# EAGLE board rekick010-panelized (EAGLE 4.16), part 1 of 2
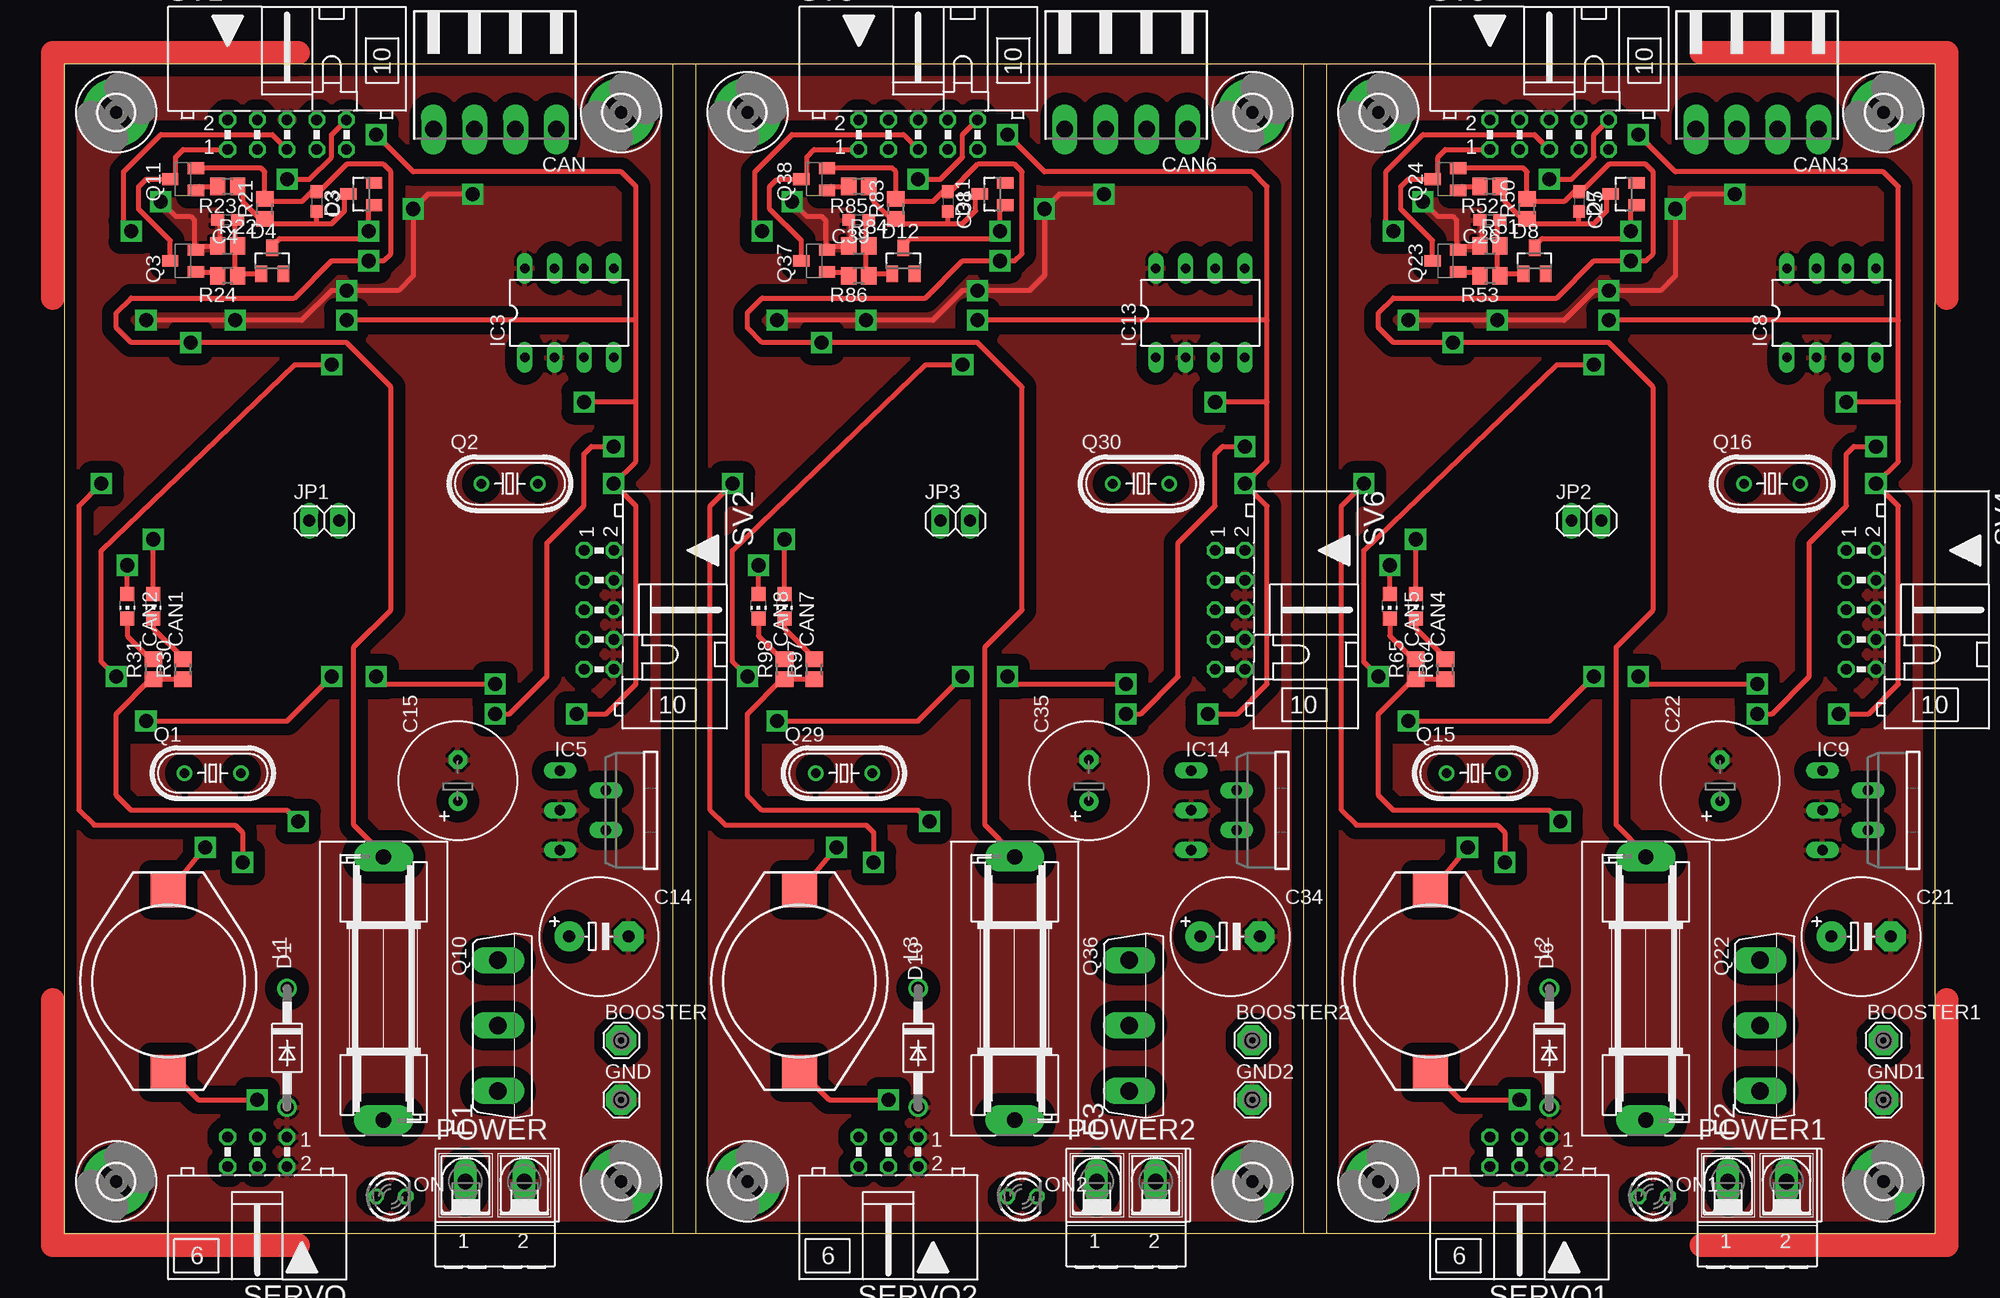
[diagram p0: board, top side]
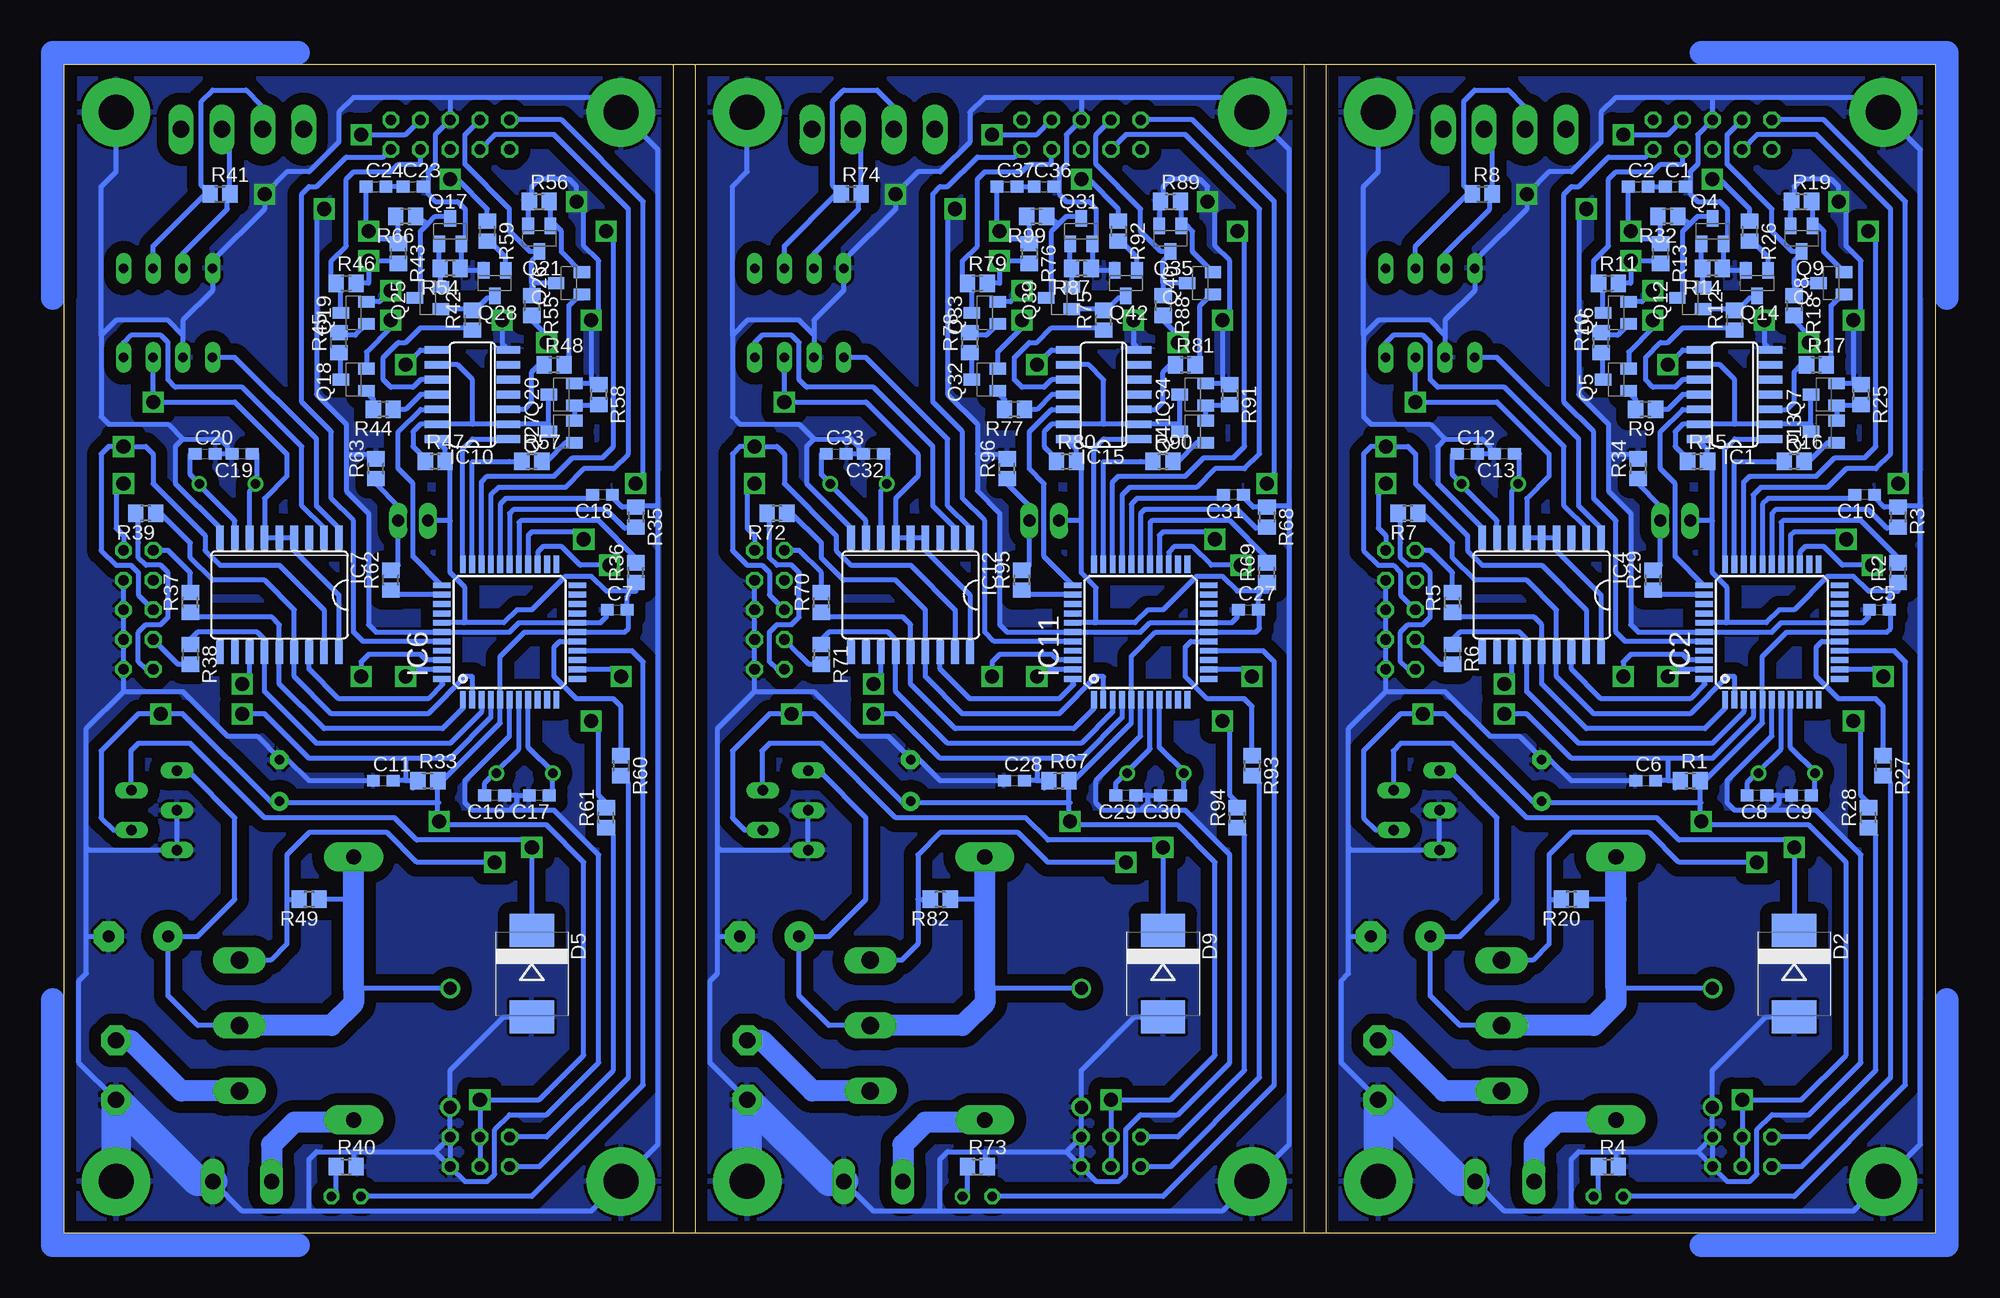
[diagram p1: board, bottom side, seen from below]

Size 160 x 100 mm. Coordinates in mm from the lower left corner, seen from the top.
Outline: 0,0 160,0
Outline: 160,0 160,100
Outline: 160,100 0,100
Outline: 0,100 0,0
Outline: 0,0 52.05,0 52.05,100 0,100
Outline: 0,100 0,0
Outline: 160,0 107.95,0 107.95,100 160,100
Outline: 160,0 160,100
Outline: 53.98,0 106.03,0 106.03,100 53.98,100 53.98,0
Copper layers (1*16): Top 0.035mm / dielectric 1.5mm / Bottom 0.035mm
Design rules "olimex_10mils": minimum track width 10mil, minimum drill 24mil, track to track 10mil, track to pad 10mil, pad to pad 10mil, via to via 10mil, smd to smd 10mil, copper to edge 40mil, drill to drill 10mil, minimum pad ring 10mil, minimum via ring 8mil, stop-mask expansion 0mil, vias tented up to drill 0mil, thermal gap 10mil
Net classes: 1 Power: width 0.406 mm

## Footprints (pad centres in the part's own frame; a part is rotated, then mirrored left to right if it is on the bottom)
SE14 = drill 1.397 pad 2.54 octagon: MP 0,0
C0603 = smd 1.1 x 1: 1 -0.85,0; 2 0.85,0
E5-10,5 = drill 1.016 pad 2.54 round: + -2.54,0 | drill 1.016 pad 2.54 octagon: - 2.54,0
E3,5-10 = drill 0.813 pad 1.6 round: + -1.778,0 | drill 0.813 pad 1.6 octagon: - 1.778,0
90-4 = drill 1.422 long: 1 -5.25,5.25; 2 -1.75,5.25; 3 1.75,5.25; 4 5.25,5.25
CHIP-LED0805 = smd 1.2 x 1.2: A 0,-1.05; C 0,1.05
DO41-10 = drill 1.118 round: A 5.08,0; C -5.08,0
SMC = smd 2.8 x 3.8: A 3.7,0; C -3.7,0
SOT23 = smd 1 x 1.4: 1 -0.95,-1.1; 2 0.95,-1.1; 3 0,1.1
SH22,5A = drill 1.321 pad 2.54 long: 1 -11.252,0; 2 11.252,0
3,0-PAD = drill 3 pad 5.842 round: B3,0 0,0
SO14 = smd 0.66 x 2.032: 1 -3.81,-3.073; 2 -2.54,-3.073; 3 -1.27,-3.073; 4 0,-3.073; 5 1.27,-3.073; 6 2.54,-3.073; 7 3.81,-3.073; 8 3.81,3.073; 9 2.54,3.073; 10 1.27,3.073; 11 0,3.073; 12 -1.27,3.073; 13 -2.54,3.073; 14 -3.81,3.073
TQFP44 = smd 1.5 x 0.5: 1 -5.8,4; 2 -5.8,3.2; 3 -5.8,2.4; 4 -5.8,1.6; 5 -5.8,0.8; 6 -5.8,0; 7 -5.8,-0.8; 8 -5.8,-1.6; 9 -5.8,-2.4; 10 -5.8,-3.2; 11 -5.8,-4; 23 5.8,-4; 24 5.8,-3.2; 25 5.8,-2.4; 26 5.8,-1.6; 27 5.8,-0.8; 28 5.8,0; 29 5.8,0.8; 30 5.8,1.6; 31 5.8,2.4; 32 5.8,3.2; 33 5.8,4 | smd 0.5 x 1.5: 12 -4,-5.8; 13 -3.2,-5.8; 14 -2.4,-5.8; 15 -1.6,-5.8; 16 -0.8,-5.8; 17 0,-5.8; 18 0.8,-5.8; 19 1.6,-5.8; 20 2.4,-5.8; 21 3.2,-5.8; 22 4,-5.8; 34 4,5.8; 35 3.2,5.8; 36 2.4,5.8; 37 1.6,5.8; 38 0.8,5.8; 39 0,5.8; 40 -0.8,5.8; 41 -1.6,5.8; 42 -2.4,5.8; 43 -3.2,5.8; 44 -4,5.8
DIL08 = drill 0.813 long: 1 -3.81,-3.81; 2 -1.27,-3.81; 3 1.27,-3.81; 4 3.81,-3.81; 5 3.81,3.81; 6 1.27,3.81; 7 -1.27,3.81; 8 -3.81,3.81
SO18L = smd 0.66 x 2.032: 1 -5.08,-4.902; 2 -3.81,-4.902; 3 -2.54,-4.902; 4 -1.27,-4.902; 5 0,-4.902; 6 1.27,-4.902; 7 2.54,-4.902; 8 3.81,-4.902; 9 5.08,-4.902; 10 5.08,4.902; 11 3.81,4.902; 12 2.54,4.902; 13 1.27,4.902; 14 0,4.902; 15 -1.27,4.902; 16 -2.54,4.902; 17 -3.81,4.902; 18 -5.08,4.902
TO220-51 = drill 0.9 long: 1 -3.4,-8.4; 2 -1.7,-4.5; 3 0,-8.4; 4 1.7,-4.5; 5 3.4,-8.4
1X02 = drill 1.016 long: 1 -1.27,0; 2 1.27,0
PISR = smd 3 x 3: P$1 -7.8,0; P$2 7.8,0
LED3MM = drill 0.813 octagon: A -1.27,0; K 1.27,0
AK500/2-H = drill 1.321 long: 1 -2.515,0; 2 2.515,0
HC49/S = drill 0.813 round: 1 -2.413,0; 2 2.413,0
HC49U-V = drill 0.813 round: 1 -2.413,0; 2 2.413,0
SOT23-BEC = smd 1 x 1.4: B -0.95,-1.1; C 0,1.1; E 0.95,-1.1
TO247BV = drill 1.499 long: D 0,-2.921; G -5.588,-2.921; S 5.588,-2.921
R0805 = smd 1.3 x 1.5: 1 -0.85,0; 2 0.85,0
ML6L = drill 0.914 octagon: 1 -2.54,-1.27; 2 -2.54,1.27; 3 0,-1.27; 4 0,1.27; 5 2.54,-1.27; 6 2.54,1.27
ML10L = drill 0.914 octagon: 1 -5.08,-1.27; 2 -5.08,1.27; 3 -2.54,-1.27; 4 -2.54,1.27; 5 0,-1.27; 6 0,1.27; 7 2.54,-1.27; 8 2.54,1.27; 9 5.08,-1.27; 10 5.08,1.27

## Placement (x,y rotation side)
BOOSTER  SE14  [SE14]  47.62,16.51 0 top
BOOSTER1  SE14  [SE14]  155.57,16.51 0 top
BOOSTER2  SE14  [SE14]  101.6,16.51 0 top
C1  0  [C0603]  22.23,89.53 0 bottom
C2  0  [C0603]  25.4,89.53 0 bottom
C3  22p  [C0603]  21.59,88.27 270 top
C4  22p  [C0603]  13.97,86.68 180 top
C5  100n  [C0603]  4.76,53.34 0 bottom
C6  100n  [C0603]  24.77,38.73 0 bottom
C7  100n  [C0603]  112.71,53.34 0 bottom
C8  22p  [C0603]  15.24,37.47 180 bottom
C9  22p  [C0603]  11.43,37.47 180 bottom
C10  100n  [C0603]  6.03,63.18 180 bottom
C11  100n  [C0603]  132.72,38.73 0 bottom
C12  22p  [C0603]  40.01,66.67 0 bottom
C13  22p  [C0603]  36.83,66.67 180 bottom
C14  220µF/35V  [E5-10,5]  45.72,25.4 0 top
C15  220µF/25V  [E3,5-10]  33.66,38.73 90 top
C16  22p  [C0603]  123.19,37.47 180 bottom
C17  22p  [C0603]  119.38,37.47 180 bottom
C18  100n  [C0603]  113.98,63.18 180 bottom
C19  22p  [C0603]  144.78,66.67 180 bottom
C20  22p  [C0603]  147.96,66.67 0 bottom
C21  220µF/35V  [E5-10,5]  153.67,25.4 0 top
C22  220µF/25V  [E3,5-10]  141.6,38.73 90 top
C23  0  [C0603]  130.18,89.53 0 bottom
C24  0  [C0603]  133.35,89.53 0 bottom
C25  22p  [C0603]  129.54,88.27 270 top
C26  22p  [C0603]  121.92,86.68 180 top
C27  100n  [C0603]  58.74,53.34 0 bottom
C28  100n  [C0603]  78.74,38.73 0 bottom
C29  22p  [C0603]  69.22,37.47 180 bottom
C30  22p  [C0603]  65.41,37.47 180 bottom
C31  100n  [C0603]  60.01,63.18 180 bottom
C32  22p  [C0603]  90.81,66.67 180 bottom
C33  22p  [C0603]  93.98,66.67 0 bottom
C34  220µF/35V  [E5-10,5]  99.69,25.4 0 top
C35  220µF/25V  [E3,5-10]  87.63,38.73 90 top
C36  0  [C0603]  76.2,89.53 0 bottom
C37  0  [C0603]  79.38,89.53 0 bottom
C38  22p  [C0603]  75.56,88.27 270 top
C39  22p  [C0603]  67.94,86.68 180 top
CAN  [90-4]  36.83,99.69 180 top
CAN1  [CHIP-LED0805]  7.62,53.66 180 top
CAN2  [CHIP-LED0805]  5.4,53.66 180 top
CAN3  [90-4]  144.78,99.69 180 top
CAN4  [CHIP-LED0805]  115.57,53.66 180 top
CAN5  [CHIP-LED0805]  113.35,53.66 180 top
CAN6  [90-4]  90.81,99.69 180 top
CAN7  [CHIP-LED0805]  61.59,53.66 180 top
CAN8  [CHIP-LED0805]  59.37,53.66 180 top
D1  1N4001  [DO41-10]  19.05,15.88 270 top
D2  MBRS360  [SMC]  12.06,22.23 270 bottom
D3  22V  [SOT23]  25.4,88.9 90 top
D4  22V  [SOT23]  17.78,83.19 0 top
D5  MBRS360  [SMC]  120.02,22.23 270 bottom
D6  1N4001  [DO41-10]  127,15.88 270 top
D7  22V  [SOT23]  133.35,88.9 90 top
D8  22V  [SOT23]  125.73,83.19 0 top
D9  MBRS360  [SMC]  66.04,22.23 270 bottom
D10  1N4001  [DO41-10]  73.03,15.88 270 top
D11  22V  [SOT23]  79.38,88.9 90 top
D12  22V  [SOT23]  71.75,83.19 0 top
F1  [SH22,5A]  27.3,20.95 90 top
F2  [SH22,5A]  135.25,20.95 90 top
F3  [SH22,5A]  81.28,20.95 90 top
GND  SE14  [SE14]  47.62,11.43 0 top
GND1  SE14  [SE14]  155.57,11.43 0 top
GND2  SE14  [SE14]  101.6,11.43 0 top
H1  MOUNT-PAD-ROUND3.0  [3,0-PAD]  4.45,95.89 0 top
H2  MOUNT-PAD-ROUND3.0  [3,0-PAD]  4.45,4.45 0 top
H3  MOUNT-PAD-ROUND3.0  [3,0-PAD]  47.62,95.89 0 top
H4  MOUNT-PAD-ROUND3.0  [3,0-PAD]  47.62,4.45 0 top
H5  MOUNT-PAD-ROUND3.0  [3,0-PAD]  112.39,95.89 0 top
H6  MOUNT-PAD-ROUND3.0  [3,0-PAD]  112.39,4.45 0 top
H7  MOUNT-PAD-ROUND3.0  [3,0-PAD]  155.57,95.89 0 top
H8  MOUNT-PAD-ROUND3.0  [3,0-PAD]  155.57,4.45 0 top
H9  MOUNT-PAD-ROUND3.0  [3,0-PAD]  58.42,95.89 0 top
H10  MOUNT-PAD-ROUND3.0  [3,0-PAD]  58.42,4.45 0 top
H11  MOUNT-PAD-ROUND3.0  [3,0-PAD]  101.6,95.89 0 top
H12  MOUNT-PAD-ROUND3.0  [3,0-PAD]  101.6,4.45 0 top
IC1  4081D  [SO14]  17.14,71.75 90 bottom
IC2  MEGA32-A  [TQFP44]  13.97,51.44 90 bottom
IC3  PCA82C250  [DIL08]  43.18,78.74 0 top
IC4  MCP2515-E/SO  [SO18L]  33.66,54.61 180 bottom
IC5  LM2576-5V  [TO220-51]  50.8,36.2 270 top
IC6  MEGA32-A  [TQFP44]  121.92,51.44 90 bottom
IC7  MCP2515-E/SO  [SO18L]  141.6,54.61 180 bottom
IC8  PCA82C250  [DIL08]  151.13,78.74 0 top
IC9  LM2576-5V  [TO220-51]  158.75,36.2 270 top
IC10  4081D  [SO14]  125.09,71.75 90 bottom
IC11  MEGA32-A  [TQFP44]  67.94,51.44 90 bottom
IC12  MCP2515-E/SO  [SO18L]  87.63,54.61 180 bottom
IC13  PCA82C250  [DIL08]  97.16,78.74 0 top
IC14  LM2576-5V  [TO220-51]  104.78,36.2 270 top
IC15  4081D  [SO14]  71.12,71.75 90 bottom
JP1  [1X02]  22.23,60.96 0 top
JP2  [1X02]  130.18,60.96 0 top
JP3  [1X02]  76.2,60.96 0 top
L1  [PISR]  8.89,21.59 270 top
L2  [PISR]  116.84,21.59 270 top
L3  [PISR]  62.87,21.59 270 top
ON  green  [LED3MM]  27.94,3.17 0 top
ON1  green  [LED3MM]  135.89,3.17 0 top
ON2  green  [LED3MM]  81.92,3.17 0 top
POWER  [AK500/2-H]  36.83,4.45 0 top
POWER1  [AK500/2-H]  144.78,4.45 0 top
POWER2  [AK500/2-H]  90.81,4.45 0 top
Q1  16MHz  [HC49/S]  12.7,39.37 0 top
Q2  16MHz  [HC49U-V]  38.1,64.14 0 top
Q3  BC847_XX  [SOT23-BEC]  10.16,83.19 90 top
Q4  BC847  [SOT23-BEC]  19.05,85.72 0 bottom
Q5  BC857  [SOT23-BEC]  27.3,73.03 90 bottom
Q6  BC847  [SOT23-BEC]  27.3,78.74 90 bottom
Q7  BC847  [SOT23-BEC]  9.53,71.75 90 bottom
Q8  BC847  [SOT23-BEC]  8.89,81.28 90 bottom
Q9  BC847  [SOT23-BEC]  11.43,85.09 180 bottom
Q10  FQA12P20  [TO247BV]  40.01,17.78 270 top
Q11  BC857_XX  [SOT23-BEC]  10.16,90.17 90 top
Q12  BC847  [SOT23-BEC]  20.95,80.01 90 bottom
Q13  BC847  [SOT23-BEC]  9.53,68.58 90 bottom
Q14  BC847  [SOT23-BEC]  15.24,81.28 180 bottom
Q15  16MHz  [HC49/S]  120.65,39.37 0 top
Q16  16MHz  [HC49U-V]  146.05,64.14 0 top
Q17  BC847  [SOT23-BEC]  127,85.72 0 bottom
Q18  BC857  [SOT23-BEC]  135.25,73.03 90 bottom
Q19  BC847  [SOT23-BEC]  135.25,78.74 90 bottom
Q20  BC847  [SOT23-BEC]  117.47,71.75 90 bottom
Q21  BC847  [SOT23-BEC]  119.38,85.09 180 bottom
Q22  FQA12P20  [TO247BV]  147.96,17.78 270 top
Q23  BC847_XX  [SOT23-BEC]  118.11,83.19 90 top
Q24  BC857_XX  [SOT23-BEC]  118.11,90.17 90 top
Q25  BC847  [SOT23-BEC]  128.91,80.01 90 bottom
Q26  BC847  [SOT23-BEC]  116.84,81.28 90 bottom
Q27  BC847  [SOT23-BEC]  117.47,68.58 90 bottom
Q28  BC847  [SOT23-BEC]  123.19,81.28 180 bottom
Q29  16MHz  [HC49/S]  66.67,39.37 0 top
Q30  16MHz  [HC49U-V]  92.08,64.14 0 top
Q31  BC847  [SOT23-BEC]  73.03,85.72 0 bottom
Q32  BC857  [SOT23-BEC]  81.28,73.03 90 bottom
Q33  BC847  [SOT23-BEC]  81.28,78.74 90 bottom
Q34  BC847  [SOT23-BEC]  63.5,71.75 90 bottom
Q35  BC847  [SOT23-BEC]  65.41,85.09 180 bottom
Q36  FQA12P20  [TO247BV]  93.98,17.78 270 top
Q37  BC847_XX  [SOT23-BEC]  64.14,83.19 90 top
Q38  BC857_XX  [SOT23-BEC]  64.14,90.17 90 top
Q39  BC847  [SOT23-BEC]  74.93,80.01 90 bottom
Q40  BC847  [SOT23-BEC]  62.87,81.28 90 bottom
Q41  BC847  [SOT23-BEC]  63.5,68.58 90 bottom
Q42  BC847  [SOT23-BEC]  69.22,81.28 180 bottom
R1  10k  [R0805]  20.95,38.73 0 bottom
R2  0  [R0805]  3.17,56.52 90 bottom
R3  0  [R0805]  3.17,61.28 270 bottom
R4  2k7  [R0805]  27.94,5.71 0 bottom
R5  4k7  [R0805]  41.27,53.98 90 bottom
R6  4k7  [R0805]  41.27,49.53 270 bottom
R7  4k7  [R0805]  45.09,61.59 180 bottom
R8  4k7  [R0805]  38.73,88.9 0 bottom
R9  1k  [R0805]  24.77,70.48 180 bottom
R10  4k7  [R0805]  28.57,76.2 90 bottom
R11  10k  [R0805]  27.94,81.28 0 bottom
R12  1k  [R0805]  17.14,78.11 90 bottom
R13  4k7  [R0805]  23.5,83.82 270 bottom
R14  2k2  [R0805]  19.05,82.55 180 bottom
R15  10k  [R0805]  20.32,66.04 0 bottom
R16  1k  [R0805]  12.06,66.04 0 bottom
R17  1k  [R0805]  10.16,74.3 0 bottom
R18  10k  [R0805]  12.06,79.38 270 bottom
R19  4k7  [R0805]  11.43,88.27 0 bottom
R20  100k  [R0805]  31.11,28.57 180 bottom
R21  47k  [R0805]  17.14,87.63 90 top
R22  47k  [R0805]  13.97,84.45 0 top
R23  4k7  [R0805]  13.97,89.53 180 top
R24  4k7  [R0805]  13.97,81.92 180 top
R25  10M  [R0805]  6.35,71.75 270 bottom
R26  1k  [R0805]  15.88,85.72 270 bottom
R27  0  [R0805]  4.45,40.01 270 bottom
R28  0  [R0805]  5.71,35.56 90 bottom
R29  100  [R0805]  24.13,55.88 90 bottom
R30  150  [R0805]  10.16,48.26 90 top
R31  150  [R0805]  7.62,48.26 90 top
R32  0000  [R0805]  22.86,87 180 bottom
R33  10k  [R0805]  128.91,38.73 0 bottom
R34  10k  [R0805]  25.4,65.41 90 bottom
R35  0  [R0805]  111.12,61.28 270 bottom
R36  0  [R0805]  111.12,56.52 90 bottom
R37  4k7  [R0805]  149.22,53.98 90 bottom
R38  4k7  [R0805]  149.22,49.53 270 bottom
R39  4k7  [R0805]  153.03,61.59 180 bottom
R40  2k7  [R0805]  135.89,5.71 0 bottom
R41  4k7  [R0805]  146.69,88.9 0 bottom
R42  1k  [R0805]  125.09,78.11 90 bottom
R43  4k7  [R0805]  131.44,83.82 270 bottom
R44  1k  [R0805]  132.72,70.48 180 bottom
R45  4k7  [R0805]  136.53,76.2 90 bottom
R46  10k  [R0805]  135.89,81.28 0 bottom
R47  10k  [R0805]  128.27,66.04 0 bottom
R48  1k  [R0805]  118.11,74.3 0 bottom
R49  100k  [R0805]  139.06,28.57 180 bottom
R50  47k  [R0805]  125.09,87.63 90 top
R51  47k  [R0805]  121.92,84.45 0 top
R52  4k7  [R0805]  121.92,89.53 180 top
R53  4k7  [R0805]  121.92,81.92 180 top
R54  2k2  [R0805]  127,82.55 180 bottom
R55  10k  [R0805]  120.02,79.38 270 bottom
R56  4k7  [R0805]  119.38,88.27 0 bottom
R57  1k  [R0805]  120.02,66.04 0 bottom
R58  10M  [R0805]  114.3,71.75 270 bottom
R59  1k  [R0805]  123.83,85.72 270 bottom
R60  0  [R0805]  112.39,40.01 270 bottom
R61  0  [R0805]  113.67,35.56 90 bottom
R62  100  [R0805]  132.08,55.88 90 bottom
R63  10k  [R0805]  133.35,65.41 90 bottom
R64  150  [R0805]  118.11,48.26 90 top
R65  150  [R0805]  115.57,48.26 90 top
R66  0000  [R0805]  130.81,87 180 bottom
R67  10k  [R0805]  74.93,38.73 0 bottom
R68  0  [R0805]  57.15,61.28 270 bottom
R69  0  [R0805]  57.15,56.52 90 bottom
R70  4k7  [R0805]  95.25,53.98 90 bottom
R71  4k7  [R0805]  95.25,49.53 270 bottom
R72  4k7  [R0805]  99.06,61.59 180 bottom
R73  2k7  [R0805]  81.92,5.71 0 bottom
R74  4k7  [R0805]  92.71,88.9 0 bottom
R75  1k  [R0805]  71.12,78.11 90 bottom
R76  4k7  [R0805]  77.47,83.82 270 bottom
R77  1k  [R0805]  78.74,70.48 180 bottom
R78  4k7  [R0805]  82.55,76.2 90 bottom
R79  10k  [R0805]  81.92,81.28 0 bottom
R80  10k  [R0805]  74.3,66.04 0 bottom
R81  1k  [R0805]  64.14,74.3 0 bottom
R82  100k  [R0805]  85.09,28.57 180 bottom
R83  47k  [R0805]  71.12,87.63 90 top
R84  47k  [R0805]  67.94,84.45 0 top
R85  4k7  [R0805]  67.94,89.53 180 top
R86  4k7  [R0805]  67.94,81.92 180 top
R87  2k2  [R0805]  73.03,82.55 180 bottom
R88  10k  [R0805]  66.04,79.38 270 bottom
R89  4k7  [R0805]  65.41,88.27 0 bottom
R90  1k  [R0805]  66.04,66.04 0 bottom
R91  10M  [R0805]  60.33,71.75 270 bottom
R92  1k  [R0805]  69.85,85.72 270 bottom
R93  0  [R0805]  58.42,40.01 270 bottom
R94  0  [R0805]  59.69,35.56 90 bottom
R95  100  [R0805]  78.11,55.88 90 bottom
R96  10k  [R0805]  79.38,65.41 90 bottom
R97  150  [R0805]  64.14,48.26 90 top
R98  150  [R0805]  61.59,48.26 90 top
R99  0000  [R0805]  76.83,87 180 bottom
SERVO  [ML6L]  16.51,6.99 180 top
SERVO1  [ML6L]  124.46,6.99 180 top
SERVO2  [ML6L]  70.48,6.99 180 top
SV1  [ML10L]  19.05,93.98 0 top
SV2  [ML10L]  45.72,53.34 270 top
SV3  [ML10L]  127,93.98 0 top
SV4  [ML10L]  153.67,53.34 270 top
SV5  [ML10L]  73.03,93.98 0 top
SV6  [ML10L]  99.69,53.34 270 top

## Library data of the parts
BOOSTER BOOSTER1 BOOSTER2 GND GND1 GND2 = solpad
C1-C39 R1-R99 = rcl
CAN CAN3 CAN6 = con-weidmueller-sl35
CAN1 CAN2 CAN4 CAN5 CAN7 CAN8 ON ON1 ON2 = led
D1-D12 = diode
F1-F3 = fuse
H1-H12 = holes
IC1 IC10 IC15 = 40xx
IC2 IC6 IC11 = atmel
IC3 IC8 IC13 = micro-philips
IC4 IC7 IC12 = mcp2515
IC5 IC9 IC14 = linear
JP1-JP3 = pinhead
L1-L3 = L-PISR
POWER POWER1 POWER2 = con-ptr500
Q1 Q2 Q15 Q16 Q29 Q30 = crystal
Q3 Q4 Q6-Q9 Q12-Q14 Q17 Q19-Q21 Q23 Q25-Q28 Q31 Q33-Q35 Q37 Q39-Q42 = transistor-npn
Q5 Q11 Q18 Q24 Q32 Q38 = transistor-pnp
Q10 Q22 Q36 = transistor-power
SERVO SERVO1 SERVO2 SV1-SV6 = con-harting-ml

## Nets
+5V [Power]: C5.2 C15.+ IC1.14 IC2.5 IC2.17 IC2.38 IC3.3 IC4.4 IC4.5 IC4.6 IC4.18 IC5.4 JP1.1 L1.P$2 Q5.E R1.2 R2.1 R15.2 R30.1 R31.1 SERVO.3 SERVO.4 SV1.8 SV2.2
+5V1 [Power]: C7.2 C22.+ IC6.5 IC6.17 IC6.38 IC7.4 IC7.5 IC7.6 IC7.18 IC8.3 IC9.4 IC10.14 JP2.1 L2.P$2 Q18.E R33.2 R36.1 R47.2 R64.1 R65.1 SERVO1.3 SERVO1.4 SV3.8 SV4.2
+5V2 [Power]: C27.2 C35.+ IC11.5 IC11.17 IC11.38 IC12.4 IC12.5 IC12.6 IC12.18 IC13.3 IC14.4 IC15.14 JP3.1 L3.P$2 Q32.E R67.2 R69.1 R80.2 R97.1 R98.1 SERVO2.3 SERVO2.4 SV5.8 SV6.2
+24V [Power]: C3.1 C14.+ D1.C F1.2 IC5.1 Q10.D Q11.E R11.2 R13.2 R18.2 R20.1 R21.2
+24V1 [Power]: C21.+ C25.1 D6.C F2.2 IC9.1 Q22.D Q24.E R43.2 R46.2 R49.1 R50.2 R55.2
+24V2 [Power]: C34.+ C38.1 D10.C F3.2 IC14.1 Q36.D Q38.E R76.2 R79.2 R82.1 R83.2 R88.2
ADC_BOOST: IC2.30 SV1.3
ADC_BOOST1: IC6.30 SV3.3
ADC_BOOST2: IC11.30 SV5.3
ADC_NORM: IC2.31 SV1.5
ADC_NORM1: IC6.31 SV3.5
ADC_NORM2: IC11.31 SV5.5
CS: IC2.44 IC4.16
CS1: IC6.44 IC7.16
CS2: IC11.44 IC12.16
GND [Power]: C1.2 C4.2 C5.1 C6.1 C8.1 C9.2 C10.1 C12.2 C13.2 C14.- C15.- D1.A D2.A GND.MP H1.B3,0 H2.B3,0 H3.B3,0 H4.B3,0 IC1.7 IC2.6 IC2.18 IC2.39 IC3.2 IC3.8 IC4.9 IC5.3 IC5.5 POWER.2 Q3.E Q4.E Q6.E Q7.E Q9.E Q14.E R3.1 R4.2 R14.1 R19.1 R22.1 R25.1 R34.2 SERVO.1 SERVO.2 SV1.6 SV2.4 SV2.6 SV2.8 SV2.10
GND1 [Power]: C7.1 C11.1 C16.1 C17.2 C18.1 C19.2 C20.2 C21.- C22.- C23.2 C26.2 D5.A D6.A GND1.MP H5.B3,0 H6.B3,0 H7.B3,0 H8.B3,0 IC6.6 IC6.18 IC6.39 IC7.9 IC8.2 IC8.8 IC9.3 IC9.5 IC10.7 POWER1.2 Q17.E Q19.E Q20.E Q21.E Q23.E Q28.E R35.1 R40.2 R51.1 R54.1 R56.1 R58.1 R63.2 SERVO1.1 SERVO1.2 SV3.6 SV4.4 SV4.6 SV4.8 SV4.10
GND2 [Power]: C27.1 C28.1 C29.1 C30.2 C31.1 C32.2 C33.2 C34.- C35.- C36.2 C39.2 D9.A D10.A GND2.MP H9.B3,0 H10.B3,0 H11.B3,0 H12.B3,0 IC11.6 IC11.18 IC11.39 IC12.9 IC13.2 IC13.8 IC14.3 IC14.5 IC15.7 POWER2.2 Q31.E Q33.E Q34.E Q35.E Q37.E Q42.E R68.1 R73.2 R84.1 R87.1 R89.1 R91.1 R96.2 SERVO2.1 SERVO2.2 SV5.6 SV6.4 SV6.6 SV6.8 SV6.10
MISO: IC2.2 IC4.15 R7.1
MISO1: IC6.2 IC7.15 R39.1
MISO2: IC11.2 IC12.15 R72.1
MOSI: IC2.1 IC4.14 R5.1
MOSI1: IC6.1 IC7.14 R37.1
MOSI2: IC11.1 IC12.14 R70.1
N$1: IC2.15 ON.A
N$2: C10.2 IC2.29
N$3: IC2.27 R2.2
N$4: C9.1 IC2.8 Q1.1
N$5: C8.2 IC2.7 Q1.2
N$6: R5.2 SV2.1
N$7: IC2.28 R3.2
N$8: R6.2 SV2.7
N$9: R7.2 SV2.9
N$10 [Power]: Q8.C Q9.C R18.1 SV1.4
N$11: C4.1 D4.1 R22.2 R24.1
N$12: IC3.1 IC4.1
N$13: Q8.E Q9.B R19.2
N$14: Q4.B Q12.E R14.2
N$15: Q12.B Q14.C R12.2
N$16: C3.2 D3.3 R21.1 R23.1
N$17: Q3.B R24.2
N$18: Q11.B R23.2
N$19: Q3.C Q11.C SV1.1
N$20: C2.1 D3.1 D4.3 R13.1 R32.2
N$21: Q8.B R17.2
N$22: IC3.4 IC4.2
N$23: Q7.B Q13.E R25.2
N$24: CAN.3 IC3.6 R8.1
N$25: Q13.B R16.2
N$26: Q10.G R20.2 SV1.2
N$27: Q14.B R26.2
N$28: Q6.B R10.2
N$29: Q6.C R11.1 SV1.7
N$30 [Power]: D2.C IC5.2 L1.P$1
N$31: ON.K R4.1
N$32: Q5.C R10.1
N$33: Q5.B R9.2
N$34: R26.1 SV1.10
N$35: IC1.11 R9.1
N$36: IC1.10 R12.1
N$37: R27.2 SERVO.6
N$38: R28.1 SERVO.5
N$39: C17.1 IC6.8 Q15.1
N$40: IC1.3 R17.1
N$41: BOOSTER.MP Q10.S
N$42: IC2.42 IC4.12
N$43 [Power]: F1.1 POWER.1
N$44: CAN2.C R31.2
N$45: CAN1.C R30.2
N$46: IC2.35 R29.1
N$47: JP1.2 R29.2 R34.1
N$48: CAN1.A IC2.26
N$49: CAN2.A IC2.25
N$50: C1.1 C2.2
N$51: Q4.C Q12.C R32.1
N$52: C16.2 IC6.7 Q15.2
N$53: C13.1 IC4.7 Q2.1
N$54: C12.1 IC4.8 Q2.2
N$55: R37.2 SV4.1
N$56: R38.2 SV4.7
N$57: R39.2 SV4.9
N$58: ON1.K R40.1
N$59: CAN.2 IC3.7 R8.2
N$60: IC6.15 ON1.A
N$61: C18.2 IC6.29
N$62: IC6.27 R36.2
N$63: IC6.28 R35.2
N$64: IC7.1 IC8.1
N$65: C19.1 IC7.7 Q16.1
N$66: C20.1 IC7.8 Q16.2
N$67: CAN3.3 IC8.6 R41.1
N$68: CAN3.2 IC8.7 R41.2
N$69: IC7.2 IC8.4
N$70 [Power]: D5.C IC9.2 L2.P$1
N$71: Q19.B R45.2
N$72: Q19.C R46.1 SV3.7
N$73: Q18.C R45.1
N$74: Q18.B R44.2
N$75: BOOSTER1.MP Q22.S
N$76 [Power]: F2.1 POWER1.1
N$77: Q22.G R49.2 SV3.2
N$78: IC10.10 R42.1
N$79: IC10.11 R44.1
N$80: IC10.3 R48.1
N$81: IC6.42 IC7.12
N$82: C26.1 D8.1 R51.2 R53.1
N$83: C25.2 D7.3 R50.1 R52.1
N$84: Q23.B R53.2
N$85: Q24.B R52.2
N$86: Q23.C Q24.C SV3.1
N$87: C24.1 D7.1 D8.3 R43.1 R66.2
N$88: Q17.B Q25.E R54.2
N$89: Q25.B Q28.C R42.2
N$90 [Power]: Q21.C Q26.C R55.1 SV3.4
N$91: Q21.B Q26.E R56.2
N$92: Q26.B R48.2
N$93: Q20.B Q27.E R58.2
N$94: Q27.B R57.2
N$95: Q28.B R59.2
N$96: R59.1 SV3.10
N$97: R60.2 SERVO1.6
N$98: R61.1 SERVO1.5
N$99: IC6.35 R62.1
N$100: JP2.2 R62.2 R63.1
N$101: CAN5.C R65.2
N$102: CAN4.C R64.2
N$103: CAN4.A IC6.26
N$104: CAN5.A IC6.25
N$105: C23.1 C24.2
N$106: Q17.C Q25.C R66.1
N$107: C30.1 IC11.8 Q29.1
N$108: C29.2 IC11.7 Q29.2
N$109: R70.2 SV6.1
N$110: R71.2 SV6.7
N$111: R72.2 SV6.9
N$112: ON2.K R73.1
N$113: IC11.15 ON2.A
N$114: C31.2 IC11.29
N$115: IC11.27 R69.2
N$116: IC11.28 R68.2
N$117: IC12.1 IC13.1
N$118: C32.1 IC12.7 Q30.1
N$119: C33.1 IC12.8 Q30.2
N$120: CAN6.3 IC13.6 R74.1
N$121: CAN6.2 IC13.7 R74.2
N$122: IC12.2 IC13.4
N$123 [Power]: D9.C IC14.2 L3.P$1
N$124: Q33.B R78.2
N$125: Q33.C R79.1 SV5.7
N$126: Q32.C R78.1
N$127: Q32.B R77.2
N$128: BOOSTER2.MP Q36.S
N$129 [Power]: F3.1 POWER2.1
N$130: Q36.G R82.2 SV5.2
N$131: IC15.10 R75.1
N$132: IC15.11 R77.1
N$133: IC15.3 R81.1
N$134: IC11.42 IC12.12
N$135: C39.1 D12.1 R84.2 R86.1
N$136: C38.2 D11.3 R83.1 R85.1
N$137: Q37.B R86.2
N$138: Q38.B R85.2
N$139: Q37.C Q38.C SV5.1
N$140: C37.1 D11.1 D12.3 R76.1 R99.2
N$141: Q31.B Q39.E R87.2
N$142: Q39.B Q42.C R75.2
N$143 [Power]: Q35.C Q40.C R88.1 SV5.4
N$144: Q35.B Q40.E R89.2
N$145: Q40.B R81.2
N$146: Q34.B Q41.E R91.2
N$147: Q41.B R90.2
N$148: Q42.B R92.2
N$149: R92.1 SV5.10
N$150: R93.2 SERVO2.6
N$151: R94.1 SERVO2.5
N$152: IC11.35 R95.1
N$153: JP3.2 R95.2 R96.1
N$154: CAN8.C R98.2
N$155: CAN7.C R97.2
N$156: CAN7.A IC11.26
N$157: CAN8.A IC11.25
N$158: C36.1 C37.2
N$159: Q31.C Q39.C R99.1
NORM_OP: IC1.2 IC1.9 IC1.13 Q7.C Q13.C R15.1
NORM_OP1: IC10.2 IC10.9 IC10.13 Q20.C Q27.C R47.1
NORM_OP2: IC15.2 IC15.9 IC15.13 Q34.C Q41.C R80.1
NOT_NORM_OP: IC2.32 R16.1
NOT_NORM_OP1: IC6.32 R57.1
NOT_NORM_OP2: IC11.32 R90.1
ON_HOLD: IC2.40 SV1.9
ON_HOLD1: IC6.40 SV3.9
ON_HOLD2: IC11.40 SV5.9
POW_ON: IC1.1 IC2.33
POW_ON1: IC6.33 IC10.1
POW_ON2: IC11.33 IC15.1
PWM_BOOST: IC1.8 IC2.13
PWM_BOOST1: IC6.13 IC10.8
PWM_BOOST2: IC11.13 IC15.8
PWM_SERVO1: IC2.16 R27.1
PWM_SERVO2: IC2.43 R28.2
PWM_SERVO3: IC6.16 R60.1
PWM_SERVO4: IC6.43 R61.2
PWM_SERVO5: IC11.16 R93.1
PWM_SERVO6: IC11.43 R94.2
RELEASE: IC1.12 IC2.34
RELEASE1: IC6.34 IC10.12
RELEASE2: IC11.34 IC15.12
RST: C6.2 IC2.4 IC4.17 R1.1 SV2.5
RST1: C11.2 IC6.4 IC7.17 R33.1 SV4.5
RST2: C28.2 IC11.4 IC12.17 R67.1 SV6.5
SCK: IC2.3 IC4.13 R6.1
SCK1: IC6.3 IC7.13 R38.1
SCK2: IC11.3 IC12.13 R71.1